# EAGLE board tiny13_charlie4_50mm_2xAAA_optical_diag (EAGLE 6.2)
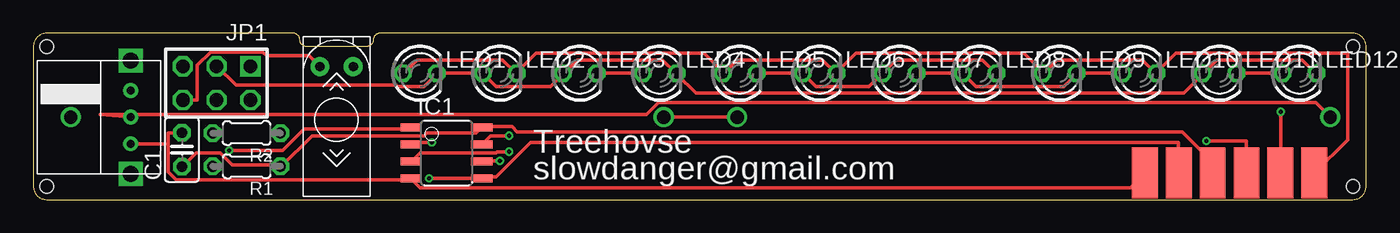
[diagram p0: board, top side]
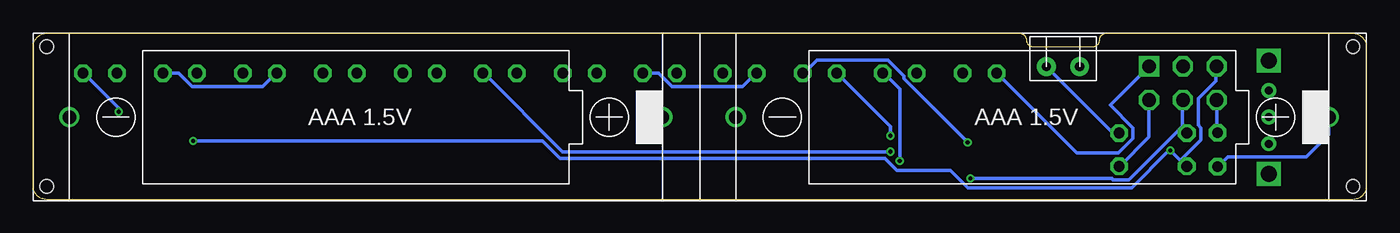
[diagram p1: board, bottom side, seen from below]

Size 100 x 12.5 mm. Coordinates in mm from the lower left corner, seen from the top.
Outline: 0,11.5 0,1 arc90 1,0 99,0 arc90 100,1 100,11.5 arc90 99,12.5 26,12.5 arc90 25.5,12 arc-90 25,11.5 20.5,11.5 arc-90 20,12 arc90 19.5,12.5 1,12.5 arc90 0,11.5
Copper layers (1*16): Top 0.035mm / dielectric 1.5mm / Bottom 0.035mm
Design rules: minimum track width 10mil, minimum drill 12mil, track to track 7mil, track to pad 7mil, pad to pad 7mil, via to via 7mil, smd to smd 0mil, copper to edge 20mil, drill to drill 10mil, minimum pad ring 10mil, minimum via ring 6mil, stop-mask expansion 2mil, vias tented up to drill 100mil, thermal gap 10mil
Holes 1 mm at 1,11.5 1,1 99,11.5 99,1

## Footprints (pad centres in the part's own frame; a part is rotated, then mirrored left to right if it is on the bottom)
C025-025X050 = drill 0.813 octagon: 1 -1.27,0; 2 1.27,0
8S1 = smd 0.6 x 1.6: 1 -1.905,-2.654; 2 -0.645,-2.654; 3 0.625,-2.654; 4 1.895,-2.654; 5 1.905,2.654; 6 0.635,2.654; 7 -0.635,2.654; 8 -1.905,2.654
AVR-ISP-6 = drill 1.016 square: 1 -2.54,-1.27 | drill 1.016 octagon: 2 -2.54,1.27; 3 0,-1.27; 4 0,1.27; 5 2.54,-1.27; 6 2.54,1.27
LED3MM = drill 0.813 octagon: A -1.27,0; K 1.27,0
0204/5 = drill 0.813 octagon: 1 -2.54,0; 2 2.54,0
TILT_SWITCH_VAR = drill 0.7 pad 1.422: P$1 2.25,1.25; P$2 2.25,3.75
CONTACT_ISP_PROGRAMMER_1X6_ATMEL = smd 1.93 x 3.81: GND 6.35,0; MISO -6.35,0; MOSI 3.81,0; RST -1.27,0; SCK -3.81,0; VCC 1.27,0
AAA_THROUGH_HOLE = drill 1: P$1 2.8,6.3; P$2 47.3,6.3
SWITCH = drill 0.6: 1 2.25,6.25; 2 2.25,4.25; 3 2.25,2.25 | drill 1.2 square: C1 2.25,8.5; C2 2.25,0

## Placement (x,y rotation side)
C1  [C025-025X050]  11.15,3.75 90 top
IC1  TINY13-20SSU  [8S1]  31,3.5 270 top
JP1  AVR-ISP-6  [AVR-ISP-6]  13.75,8.75 180 top
LED1  [LED3MM]  29,9.5 0 top
LED2  [LED3MM]  35,9.5 0 top
LED3  [LED3MM]  41,9.5 0 top
LED4  [LED3MM]  47,9.5 0 top
LED5  [LED3MM]  53,9.5 0 top
LED6  [LED3MM]  59,9.5 0 top
LED7  [LED3MM]  65,9.5 0 top
LED8  [LED3MM]  71,9.5 0 top
LED9  [LED3MM]  77,9.5 0 top
LED10  [LED3MM]  83,9.5 0 top
LED11  [LED3MM]  89,9.5 0 top
LED12  [LED3MM]  95,9.5 0 top
R1  [0204/5]  16,2.5 180 top
R2  [0204/5]  16,5 180 top
U$1  TILT_SWITCH_WRAP  [TILT_SWITCH_VAR]  20.25,12.25 270 top
U$2  AVR_ISP_6_PIN_1X6_SMT_CONTACT_BIG  [CONTACT_ISP_PROGRAMMER_1X6_ATMEL]  89.75,2 180 top
U$3  1XAAA  [AAA_THROUGH_HOLE]  0,12.5 180 bottom
U$4  SWITCH  [SWITCH]  9.55,10.45 180 top
U$5  1XAAA  [AAA_THROUGH_HOLE]  50,12.5 180 bottom

## Library data of the parts
C1 R1 R2 = resistor
IC1 = atmel; MPN: ATTINY13-20SSU; OC_FARNELL: 1455133; OC_NEWARK: 58M3771
JP1 = avr-5
LED1-LED12 = 0-svo
U$1-U$5 = Mrule

## Nets
GND: C1.2 IC1.4 JP1.6 U$1.P$1 U$2.GND U$4.1
N$1: IC1.2 LED3.K LED4.A LED5.K LED6.A LED7.A LED8.K
N$2: IC1.7 JP1.3 LED1.K LED2.A LED3.A LED4.K LED11.A LED12.K U$2.SCK
N$3: R2.1 U$1.P$2
N$4: IC1.3 LED7.K LED8.A LED9.K LED10.A LED11.K LED12.A
N$5: IC1.5 JP1.4 R2.2 U$2.MOSI
N$6: IC1.1 JP1.5 R1.2 U$2.RST
N$7: U$3.P$2 U$5.P$1
N$8: IC1.6 JP1.1 LED1.A LED2.K LED5.A LED6.K LED9.A LED10.K U$2.MISO
N$9: U$4.2 U$5.P$2
VCC: C1.1 IC1.8 JP1.2 R1.1 U$2.VCC U$3.P$1

## Tracks (layer width: path | path; a pad name or v marks a point on that pad's centre or on a via)
GND
  Top 0.254: U$1.P$1 20.7,10.8 17.5,10.8 17.2,11.1 13.3,11.1 12.3,10.1 12.3,7.5 11.3,7.5 JP1.6 | 10.1,4.2 10.1,5 11.1,5 C1.2 | 10.1,4.2 10.1,2.1 10.7,1.5 28.2,1.5 28.3,1.6 IC1.4 28.4,1.5 29,0.9 82.3,0.9 U$2.GND | 10.1,4.2 U$4.1
  Bottom 0.254: JP1.6 11.2,7.4 11.2,5.1 C1.2
N$1  (via drill 0.3)
  Top 0.254: LED5.K LED6.A 57.8,9.4 58.7,8.5 62.7,8.5 63.7,9.5 LED7.A 63.8,9.6 64.7,10.5 71.2,10.5 72.2,9.5 LED8.K | v29.9,4.3 28.5,4.3 28.4,4.2 IC1.2 | LED3.K LED4.A
  Bottom 0.254: v29.9,4.3 34.7,9.1 34.7,9.3 35.9,10.5 41.2,10.5 42.2,9.5 LED3.K | LED5.K 53.1,9.5 52.1,8.5 46.8,8.5 45.8,9.5 LED4.A
N$2  (via drill 0.3)
  Top 0.254: JP1.3 13.8,10 15.2,8.6 27.2,8.6 27.3,8.5 29.3,8.5 30.2,9.4 LED1.K LED2.A 33.8,9.4 34.7,8.5 38.8,8.5 39.7,9.4 LED3.A 39.8,9.5 40.8,10.5 47.2,10.5 48.2,9.5 LED4.K 48.3,9.4 49.7,8 86.3,8 87.7,9.4 LED11.A 87.8,9.5 88.8,10.5 95.2,10.5 96.2,9.5 LED12.K | v93.6,6.6 93.6,2 U$2.SCK | v35.7,4.8 34.3,4.8 33.7,4.2 IC1.7
  Bottom 0.254: v93.6,6.6 93.6,6.9 96.2,9.5 LED12.K | v35.7,4.8 35.7,5.5 39.7,9.5 LED3.A
N$3
  Bottom 0.254: R2.1 19,5 U$1.P$2
N$4  (via drill 0.3)
  Top 0.254: LED12.A LED11.K | LED10.A LED9.K 78.2,9.4 77.3,8.5 70.7,8.5 69.8,9.4 LED8.A LED7.K | v35.7,3.6 34.8,3.6 34.7,3.5 29,3.5 28.4,2.9 IC1.3
  Bottom 0.254: v35.7,3.6 60.3,3.6 66.2,9.5 LED7.K | LED11.K 89.1,9.5 88.1,8.5 82.8,8.5 81.8,9.5 LED10.A
N$5  (via drill 0.3)
  Top 0.254: v29.7,1.6 33.6,1.6 IC1.5 33.7,1.7 34.7,1.7 37.3,4.3 85.9,4.3 85.9,2 U$2.MOSI
  Bottom 0.254: v29.7,1.6 19.1,1.6 19,1.5 17.8,1.5 13.9,5.4 13.5,5 R2.2 13.8,5.4 13.8,7.4 JP1.4
N$6  (via drill 0.3)
  Top 0.254: v14.7,3.7 18.7,3.7 20.3,5.3 28.2,5.3 28.3,5.4 IC1.1 | v88,4.4 91,4.4 91,2 U$2.RST
  Bottom 0.254: 13.95,2.95 13.5,2.5 R1.2 | 13.95,2.95 v14.7,3.7 14.8,3.7 17.6,0.9 29.9,0.9 31.2,2.2 35.2,2.2 36.1,3.1 60.5,3.1 61.8,4.4 v88,4.4 | 13.95,2.95 12.4,4.5 12.4,5.4 12.6,5.6 12.6,7.6 11.3,8.9 11.3,10 JP1.5
N$7
  Top 0.254: U$5.P$1 U$3.P$2
N$8  (via drill 0.3)
  Top 0.254: v35,2.9 33.7,2.9 IC1.6 | LED1.A 27.8,9.5 28.8,10.5 35.2,10.5 36.2,9.5 LED2.K 36.3,9.6 37.7,11 50.3,11 51.7,9.6 LED5.A 51.8,9.5 52.8,10.5 59.2,10.5 60.2,9.5 LED6.K 60.3,9.6 61.7,11 74.3,11 75.7,9.6 LED9.A 75.8,9.5 76.8,10.5 83.2,10.5 84.2,9.5 LED10.K 84.3,9.6 85.7,11 98.6,11 98.6,4.5 U$2.MISO
  Bottom 0.254: v35,2.9 35,8.3 36.2,9.5 LED2.K | JP1.1 16.3,10 19.2,7.1 17.5,5.4 17.5,4.6 18.6,3.5 21.7,3.5 27.7,9.5 LED1.A
N$9
  Top 0.254: U$4.2 5,6.4 46,6.4 46.9,7.3 96.2,7.3 U$5.P$2
VCC
  Top 0.254: C1.1 11.2,2.5 12.2,3.5 14,3.5 14.9,2.6 18.5,2.6 R1.1 18.6,2.5 20.9,4.8 29.3,4.8 29.5,5 33.2,5 33.6,5.4 IC1.8 33.7,5.5 35.9,5.5 36.3,5.1 86.2,5.1 87.6,3.7 88.4,3.7 88.4,2 U$2.VCC
  Bottom 0.254: U$3.P$1 2.8,4.9 4.5,3.2 10.4,3.2 11.1,2.5 C1.1 | JP1.2 16.3,7.4 16.3,4.7 18.5,2.5 R1.1

## Text on the board
tPlace: Treehovse | slowdanger@gmail.com